# Altium PCB PCB.PcbDoc
Units mil, origin at the board's own origin, x right, y up, seen from the top; angles counter-clockwise.
Board outline 6000 x 4000 mil, 2 copper layers (Top Layer, Bottom Layer); 93 components, 44 nets, 257 pads, 0 vias.
Unrouted connection lines stored in the file: 190.
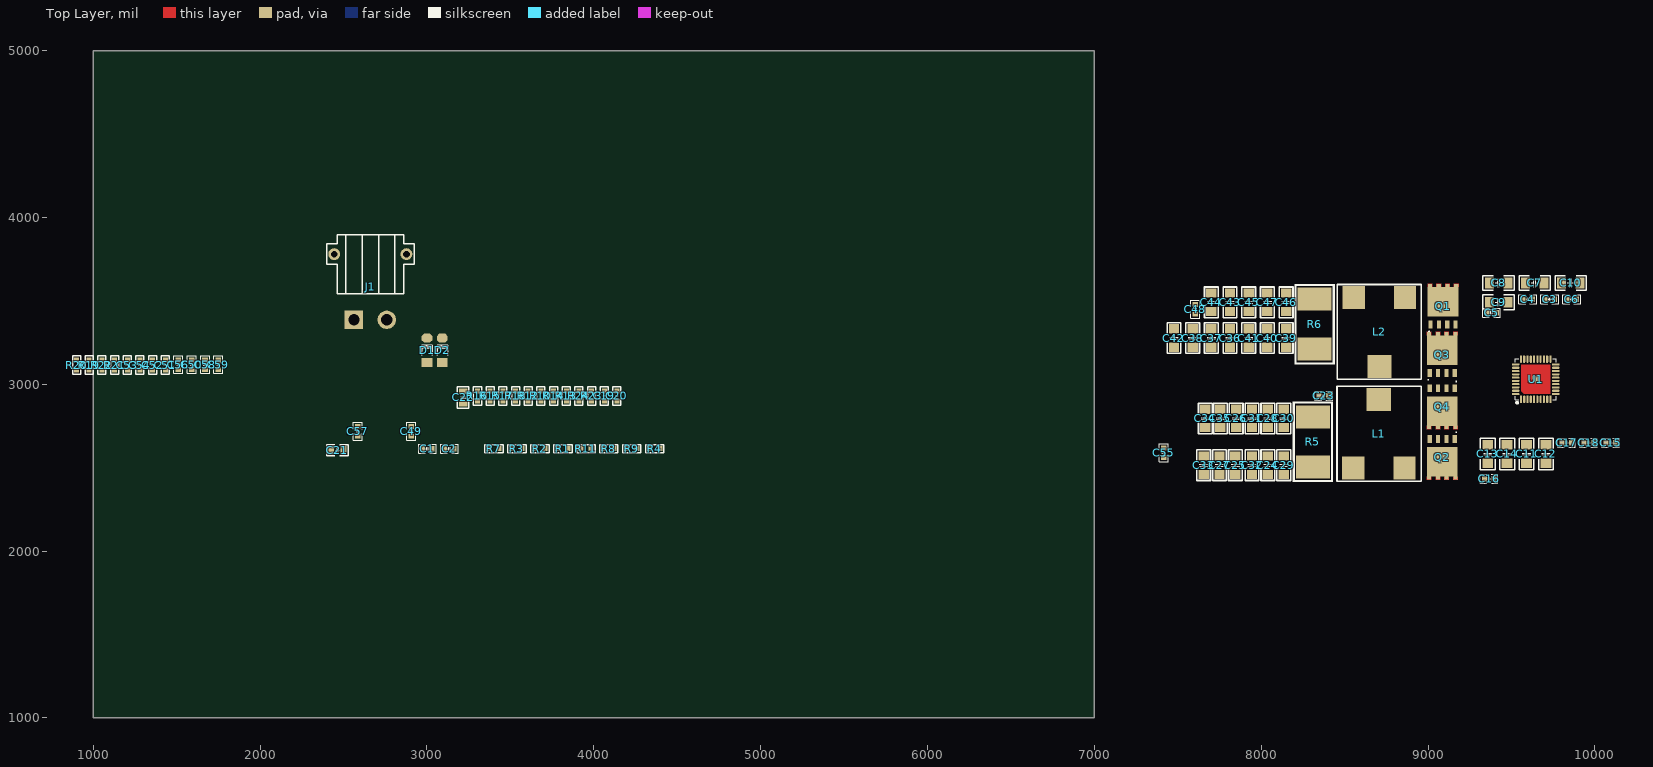
[diagram p0: Top Layer view]
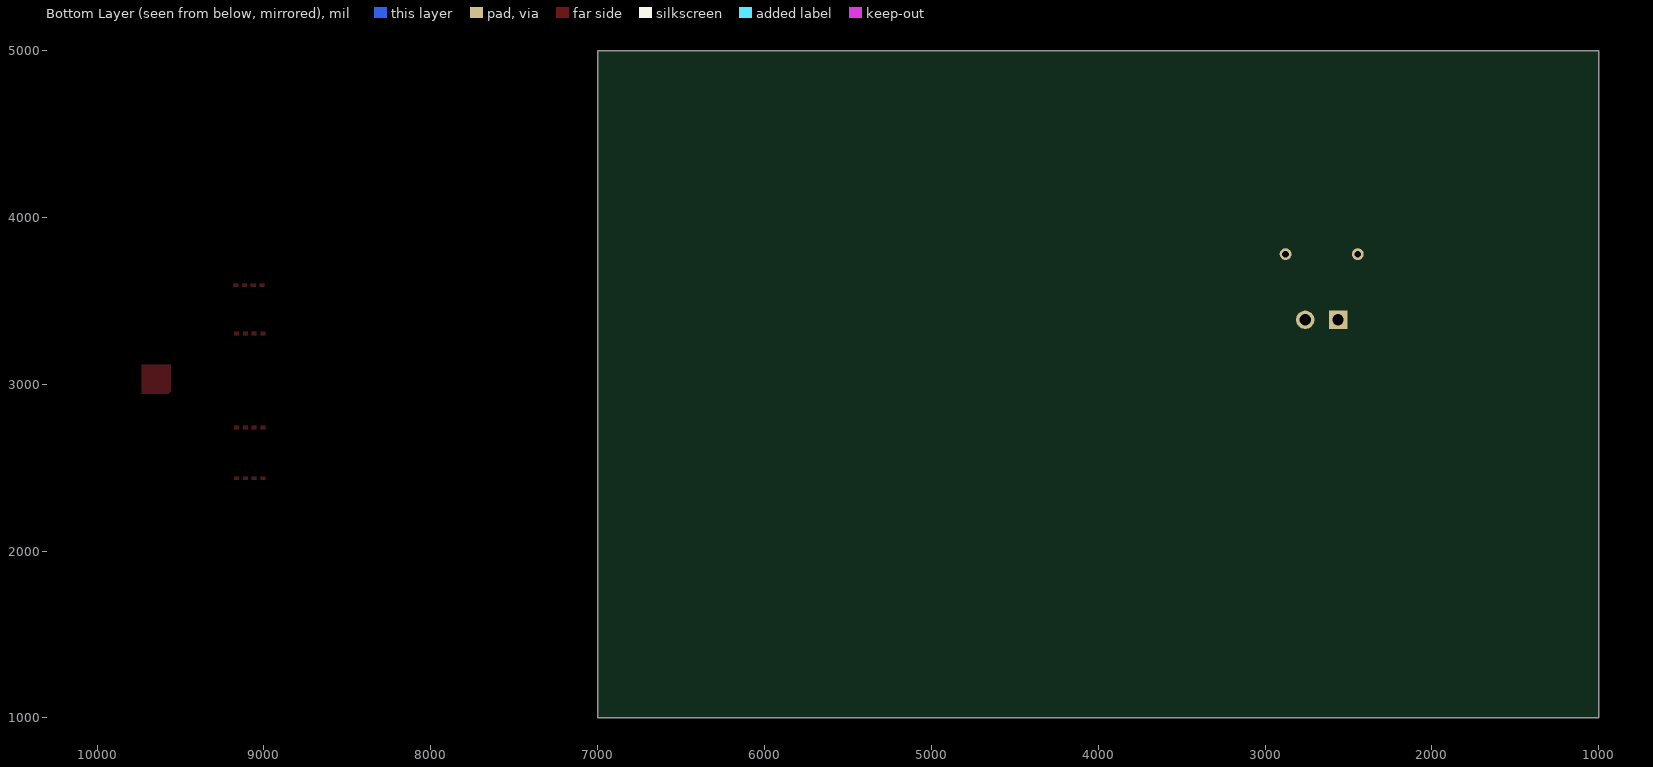
[diagram p1: Bottom Layer view, seen from below]

## Layer stack, top to bottom
Top Solder: solder mask 0.4, Solder Resist, Dk 3.5
Top Layer: signal copper 1.4
Dielectric 1: dielectric 12.6, FR-4, Dk 4.8
Bottom Layer: signal copper 1.4
Bottom Solder: solder mask 0.4, Solder Resist, Dk 3.5

## Board outline
1000,1000 7000,1000 7000,5000 1000,5000

## Design rules (kind name [scope] priority, off if disabled: settings)
Clearance [All] p1: gap=10 ignorepadtopadclearanceinfootprint=FALSE except(0: Arc-Hole Track-Hole SMDPad-Hole THPad-Hole Via-Hole Fill-Hole Poly-Hole Region-Hole Text-Hole)
PolygonConnect [All] p1: connectstyle=Relief reliefconductorwidth=10 reliefentries=4 polygonreliefangle="90 Angle" airgapwidth=10
RoutingVias [All] p1: holewidth=28 width=50 viastyle="Through Hole" minholewidth=28 minwidth=50 maxholewidth=28 maxwidth=50
SolderMaskExpansion [All] p1: expansion=4 istentingtop=FALSE
Width [All] p1: maxlimit=10 minlimit=10 preferedwidth=10
30 further rules are at their usual default settings.

## Components (designator, comment, footprint, x,y, rotation, side; value= is the part's Value field where it differs from the comment)
C1 "100nF 50V" C0603_l 3003,2612.79 r0 top
C2 "100nF 50V" C0603_l 3135,2612.79 r0 top
C3 "100nF 50V" C0603_l 9729,3509 r0 top
C4 "100nF 50V" C0603_l 9597,3509 r0 top
C5 "100nF 50V" C0603_l 9381,3429 r0 top
C6 "100nF 50V" C0603_l 9861,3509 r0 top
C7 "10uF 50V" C1206_l 9639,3607 r0 top
C8 "10uF 50V" C1206_l 9423,3607 r0 top
C9 "10uF 50V" C1206_l 9423,3491 r0 top
C10 "10uF 50V" C1206_l 9855,3607 r0 top
C11 "10uF 50V" C1206_l 9590,2582 r270 top
C12 "10uF 50V" C1206_l 9706,2582 r270 top
C13 "10uF 50V" C1206_l 9358,2582 r270 top
C14 "10uF 50V" C1206_l 9474,2582 r270 top
C15 "100nF 50V" C0603_l 10094,2650 r0 top
C16 "100nF 50V" C0603_l 9366,2434 r0 top
C17 "100nF 50V" C0603_l 9830,2650 r0 top
C18 "100nF 50V" C0603_l 9962,2650 r0 top
C19 "Null" "C 0603_L" 4063,2929.97 r90 top
C20 "Null" "C 0603_L" 4139,2929.97 r90 top
C21 "DNP" "C 0805_L" 2463,2604.79 r0 top
C22 "DNP" "C 0805_L" 3217,2920.79 r90 top
C23 "100nF 50V" C0603_l 8375,2930 r180 top
C24 "22uF 25V" "C 1206_L" 8040,2515 r90 top
C25 "22uF 25V" "C 1206_L" 7845,2514.89 r90 top
C26 "22uF 25V" "C 1206_L" 7850,2795 r270 top
C27 "22uF 25V" "C 1206_L" 7750,2514.89 r90 top
C28 "22uF 25V" "C 1206_L" 8040,2795 r270 top
C29 "22uF 25V" "C 1206_L" 8135,2515 r90 top
C30 "22uF 25V" "C 1206_L" 8135,2795 r270 top
C31 "22uF 25V" "C 1206_L" 7945,2795 r270 top
C32 "22uF 25V" "C 1206_L" 7945,2515 r90 top
C33 "22uF 25V" "C 1206_L" 7655,2514.89 r90 top
C34 "22uF 25V" "C 1206_L" 7665,2795.11 r270 top
C35 "22uF 25V" "C 1206_L" 7755,2795.11 r270 top
C36 "22uF 25V" "C 1206_L" 7813,3277 r270 top
C37 "22uF 25V" "C 1206_L" 7701,3277 r270 top
C38 "22uF 25V" "C 1206_L" 7589,3277 r270 top
C39 "22uF 25V" "C 1206_L" 8149,3277 r270 top
C40 "22uF 25V" "C 1206_L" 8037,3277 r270 top
C41 "22uF 25V" "C 1206_L" 7925,3277 r270 top
C42 "22uF 25V" "C 1206_L" 7477,3277 r270 top
C43 "22uF 25V" "C 1206_L" 7813,3491 r270 top
C44 "22uF 25V" "C 1206_L" 7701,3491 r270 top
C45 "22uF 25V" "C 1206_L" 7925,3491 r270 top
C46 "22uF 25V" "C 1206_L" 8149,3491 r270 top
C47 "22uF 25V" "C 1206_L" 8037,3491 r270 top
C48 "100nF 50V" C0603_l 7605,3450 r270 top
C49 "100nF 50V" C0603_l 2905,2718.79 r90 top
C50 "100nF 50V" C0603_l 1590,3117.79 r90 top
C51 "1nF 50V" "C 0603_L" 1432,3114.97 r90 top
C52 "1nF 50V" "C 0603_L" 1356,3114.97 r90 top
C53 "15pF 50V" "C 0603_L" 1204,3114.97 r90 top
C54 "15pF 50V" "C 0603_L" 1280,3114.97 r90 top
C55 "100nF 50V" C0603_l 7415,2590 r90 top
C56 "100nF 50V" C0603_l 1510,3117.79 r90 top
C57 "100nF 50V" C0603_l 2585,2718.79 r90 top
C58 "100nF 50V" C0603_l 1670,3117.79 r90 top
C59 "100nF 50V" C0603_l 1750,3117.79 r90 top
D1 "1N4148" "MINI_MELF (LL34)" 3000.39,3203.1 r90 top
D2 "1N4148" "MINI_MELF (LL34)" 3092.17,3203.1 r90 top
J1 "XT30" XT30PW-M 2660.75,3583.07 r0 top
L1 "0.68uH" MHW1306SG1R0M 8551.46,2496.61 r0 top
L2 "0.68uH" MHW1306SG1R0M 8862.09,3520 r180 top
Q1 "Nmos_DFN8_5*6" DFN8_5*6 9090,3468.43 r0 top
Q2 "Nmos_DFN8_5*6" DFN8_5*6 9085,2561.57 r180 top
Q3 "Nmos_DFN8_5*6" DFN8_5*6 9085,3178.43 r0 top
Q4 "Nmos_DFN8_5*6" DFN8_5*6 9085,2865 r180 top
R1 "1R 1%" "R 0603_L" 3814.75,2614.79 r0 top
R2 "1R 1%" "R 0603_L" 3677.11,2614.79 r0 top
R3 "1R 1%" "R 0603_L" 3539.47,2614.79 r0 top
R4 "1R 1%" "R 0603_L" 4365.33,2614.79 r0 top
R5 "1mR" R3920 8310,2655 r90 top
R6 "1mR" R3920 8320,3360 r270 top
R7 "DNP" "R 0603_L" 3401.82,2614.79 r0 top
R8 "DNP" "R 0603_L" 4090.04,2614.79 r0 top
R9 "49.9R 1%" "R 0603_L" 4227.69,2614.79 r0 top
R10 "0R 1%" "R 0603_L" 3683,2929.97 r90 top
R11 "0R 1%" "R 0603_L" 3952.4,2614.79 r0 top
R12 "49.9R 1%" "R 0603_L" 3607,2929.97 r90 top
R13 "1R 1%" "R 0603_L" 3835,2929.97 r90 top
R14 "1R 1%" "R 0603_L" 3759,2929.97 r90 top
R15 "1R 1%" "R 0603_L" 3379,2929.97 r90 top
R16 "DNP" "R 0603_L" 3303,2929.97 r90 top
R17 "DNP" "R 0603_L" 3455,2929.97 r90 top
R18 "DNP" "R 0603_L" 3531,2929.97 r90 top
R19 "DNP" "R 0603_L" 976,3114.97 r90 top
R20 "1R 1%" "R 0603_L" 900,3114.97 r90 top
R21 "1R 1%" "R 0603_L" 1128,3114.97 r90 top
R22 "1R 1%" "R 0603_L" 1052,3114.97 r90 top
R23 "20K 1%" "R 0603_L" 3987,2929.97 r90 top
R24 "20K 1%" "R 0603_L" 3911,2929.97 r90 top
U1 "LM5143QRHARQ1" "QFN40 6X6_M" 9645,3030 r0 top

## Footprints (in the part's own frame and the unit in brackets; to place one, negate y for a bottom-side part, rotate by r counter-clockwise, add the part's x,y. Pads: shape width x height; smd on the part's side, far side on the other; paste and mask are expansions set on the pad)
C0603_l [mm] "贴片MLCC电容"
  rect 0.75x0.85 smd: 1(-0.725,0) 2(0.725,0)
  silkscreen extent -1.35,-0.69 1.35,0.69, body extent -0.8,-0.4 0.8,0.4, height 0.8
C1206_l [mm] "贴片MLCC电容"
  rect 1.4x1.65 smd: 1(-1.4,0) 2(1.4,0)
  silkscreen extent -2.39,-1.12 2.39,1.12, body extent -1.6,-0.8 1.6,0.8, height 1.1
"C 0603_L" [mil] "无极性贴片电容"
  rect 30x30 smd: 1(-30.59,0) 2(30.59,0)
  silkscreen extent -55,-24 55,24, body extent -31,-16 31,16, height 32
"C 0805_L" [mil] "无极性贴片电容"
  rect 35x50 smd: 1(-37.4,0) 2(37.4,0)
  silkscreen extent -64,-34 64,34, body extent -39,-24 39,24, height 20
"C 1206_L" [mil] "无极性贴片电容"
  rect 55x62 smd: 1(-55.12,0) 2(55.11,0)
  silkscreen extent -92,-41 92,41, body extent -63,-32 63,32, height 48
DFN8_5*6 [mm] "TDSON, 8-Leads, Body 6.15x5.15mm, Pitch 1.27mm"
  rect 0.65x1.2 smd: 1(-1.905,-2.825) 2(-0.635,-2.825) 3(0.635,-2.825) 4(1.905,-2.825) 5(-2.007,2.794) 5(-0.66,2.794) 5(0.66,2.794) 5(2.007,2.794)
  rect 4.7x4.5 smd: 5(0,0.675)
  Top Layer region: -2.35,2.925 -1.65,2.925 -1.65,3.425 -2.35,3.425
  Top Layer region: 1.65,2.925 2.35,2.925 2.35,3.425 1.65,3.425
  Top Layer region: -1.015,2.925 -0.315,2.925 -0.315,3.425 -1.015,3.425
  Top Layer region: 0.315,2.925 1.015,2.925 1.015,3.425 0.315,3.425
  silkscreen extent -2.23,-3.94 -2.03,-3.74, body extent -2.58,-3.08 2.58,3.08, height 1
MHW1306SG1R0M [mm] "贴片 1R0 1uH 30A大电流一体成型扁平铜线功率电感"
  rect 3.4x3.5 smd: 1(0,0) 2(7.8,0)
  rect 3.7x3.5 smd: EP(3.9,10.5)
  silkscreen extent -2.46,-1.98 10.34,12.47, body extent -2.34,-2.15 10.16,11.04, height 6
"MINI_MELF (LL34)" [mm] "1.5*3.4mm(直径，脚距）"
  rect 1.37x1.62 smd: 1(-1.855,0)
  oct 1.37x1.62 smd: 2(1.855,0)
  silkscreen extent -0.76,-0.8 0.78,0.8, body extent -1.7,-0.75 1.7,0.75, height 1.5
"QFN40 6X6_M" [mm] "40脚，长x宽x高：6x6x1mm，脚距：0.5mm"
  rect 0.325x1.15 smd mask+0.051: 1(-2.25,-3.051)
  oval 0.325x1.15 smd mask+0.051: 2(-1.75,-3.051) 3(-1.25,-3.051) 4(-0.75,-3.051) 5(-0.25,-3.051) 6(0.25,-3.051) 7(0.75,-3.051) 8(1.25,-3.051) 9(1.75,-3.051) 10(2.25,-3.051) 21(2.25,3.076) 22(1.75,3.076) 23(1.25,3.076) 24(0.75,3.076) 25(0.25,3.076) 26(-0.25,3.076) 27(-0.75,3.076) 28(-1.25,3.076) 29(-1.75,3.076) 30(-2.25,3.076)
  oval 1.15x0.325 smd mask+0.051: 11(3.051,-2.25) 12(3.051,-1.75) 13(3.051,-1.25) 14(3.051,-0.75) 15(3.051,-0.25) 16(3.051,0.25) 17(3.051,0.75) 18(3.051,1.25) 19(3.051,1.75) 20(3.051,2.25) 31(-3.051,2.25) 32(-3.051,1.75) 33(-3.051,1.25) 34(-3.051,0.75) 35(-3.051,0.25) 36(-3.051,-0.25) 37(-3.051,-0.75) 38(-3.051,-1.25) 39(-3.051,-1.75) 40(-3.051,-2.25)
  rect 1x1 smd mask+0.051: 41(0,0)
  Top Layer region: -2.2,2.2 2.2,2.2 2.2,-2.2 -1.8,-2.2 -2.2,-1.8
  silkscreen extent -3.1,-3.72 3.1,3.1, body extent -3.01,-3.01 3.01,3.01, height 0.9
R3920 [mm]
  rect 3.5x5.2 smd: 1(-3.81,0) 2(3.81,0)
  silkscreen extent -6.1,-3.05 6.1,3.05, body extent -4.96,-2.55 4.96,2.55, height 1.28
"R 0603_L" [mil] "1/10W贴片电阻"
  rect 30x30 smd: 1(-30.59,0) 2(30.59,0)
  silkscreen extent -55,-24 55,24, body extent -31,-16 32,16, height 16
XT30PW-M [mm] "TH, 4-Leads, Body 13.95x13.3mm"
  rect 2.8x2.8 hole 1.7: 1(-2.5,-5)
  round 2.8 hole 1.7: 2(2.5,-5)
  round 1.8 hole 1: MP1(-5.5,5) MP2(5.5,5)
  silkscreen extent -6.65,-1.05 6.65,7.95, body extent -6.65,-6 6.65,7.95, height 5.05

## Part data
C1 C2 C3 C4 C5 C6 C7 C8 C9 C10 C11 C12 C13 C14 C15 C16 C17 C18 C19 C20 C21 C22 C23 C24 C25 C26 C27 C28 C29 C30 C31 C32 C33 C34 C35 C36 C37 C38 C39 C40 C41 C42 C43 C44 C45 C46 C47 C48 C49 C50 C51 C52 C53 C54 C55 C56 C57 C58 C59: library part C, "无极性贴片电容", BOM名称=无极性贴片电容, 学习资源=www.ooocke.com, 材质=X7R, 版权归属=源创客
D1 D2: "高速开关二极管", BOM名称=高速开关二极管, 学习资源=www.ooocke.com, 版权归属=源创客
L1 L2: library part L, "小功率贴片电感", BOM名称=小功率贴片电感, 学习资源=www.ooocke.com, 版权归属=源创客
R1 R2 R3 R4 R5 R6 R7 R8 R9 R10 R11 R12 R13 R14 R15 R16 R17 R18 R19 R20 R21 R22 R23 R24: library part R, "贴片电阻", BOM名称=贴片电阻, 学习资源=www.ooocke.com, 版权归属=源创客
U1: "DCDC-Buck控制器"
Q1 Q2 Q3 Q4: BOM名称=场效应管, 学习资源=www.ooocke.com, 描述="P沟道 30V/4.2A", 版权归属=源创客

## Nets (pads, with @x,y where several pads share a name; then routed paths per layer and width w, separated by ;. In a path a pad name is that pad's centre, name@x,y a point inside that pad or via, vN(x,y) a via of type N, cw(c..) or ccw(c..) an arc to the next point about the centre after c; other vN are vias at no path point)
AGND: C51.2 C52.2 C54.2 C55.1 C56.1 C57.1 C58.1 C59.1 U1.3 U1.35
FeadBack: U1.28
NetC1_2: C1.2 D1.1 U1.16
NetC2_2: C2.2 D2.1 U1.15
NetC19_1: C19.1 L2.1 Q1.1 Q1.2 Q1.3 Q3.5 R7.1 U1.21
NetC19_2: C19.2 D1.2 U1.20
NetC20_1: C20.1 L1.2 Q2.1 Q2.2 Q2.3 Q4.5 R8.1 U1.10
NetC20_2: C20.2 D2.2 U1.11
NetC21_1: C21.1 R7.2 R19.1
NetC21_2: C21.2 L2.2 R6.1 R12.2 R18.1
NetC22_1: C22.1 R8.2 R16.1
NetC22_2: C22.2 L1.1 R5.1 R9.2 R17.1
NetC49_1: C49.1 R12.1 U1.27
NetC49_2: C49.2 R11.1 R18.2 R19.2 U1.26
NetC50_1: C50.1 R9.1 U1.4
NetC50_2: C50.2 R10.1 R16.2 R17.2 U1.5
NetC51_1: C51.1 R24.1
NetC52_1: C52.1 R23.1
NetC53_1: C53.1 R24.2 U1.29
NetC54_1: C54.1 R23.2 U1.2
NetC55_2: C55.2 U1.30
NetC56_2: C56.2 U1.1
NetC57_2: C57.2 U1.32
NetC58_2: C58.2 U1.36
NetC59_2: C59.2 U1.38
NetQ1_4: Q1.4 R2.1 R4.1
NetQ2_4: Q2.4 R1.1 R3.1
NetQ3_4: Q3.4 R14.1 R20.1
NetQ4_4: Q4.4 R13.1 R15.1
NetR1_2: R1.2 U1.9
NetR2_2: R2.2 U1.22
NetR3_2: R3.2 U1.8
NetR4_2: R4.2 U1.23
NetR13_2: R13.2 U1.13
NetR14_2: R14.2 U1.18
NetR15_2: R15.2 U1.12
NetR20_2: R20.2 U1.19
NetR21_2: R21.2 U1.39
NetR22_2: R22.2 U1.37
PGND: C1.1 C2.1 C3.1 C4.1 C5.1 C6.1 C7.1 C8.1 C9.1 C10.1 C11.1 C12.1 C13.1 C14.1 C15.1 C16.1 C17.1 C18.1 C23.1 C24.1 C25.1 C26.1 C27.1 C28.1 C29.1 C30.1 C31.1 C32.1 C33.1 C34.1 C35.1 C36.1 C37.1 C38.1 C39.1 C40.1 C41.1 C42.1 C43.1 C44.1 C45.1 C46.1 C47.1 C48.1 J1.2 Q3.1 Q3.2 Q3.3 Q4.1 Q4.2 Q4.3 R21.1 R22.1 U1.14 U1.17 U1.41
PWR_GOOD1: U1.24
PWR_GOOD2: U1.7
VBUS: C3.2 C4.2 C5.2 C6.2 C7.2 C8.2 C9.2 C10.2 C11.2 C12.2 C13.2 C14.2 C15.2 C16.2 C17.2 C18.2 J1.1 Q1.5 Q2.5 U1.25 U1.31 U1.34 U1.40
VOUT12V: C23.2 C24.2 C25.2 C26.2 C27.2 C28.2 C29.2 C30.2 C31.2 C32.2 C33.2 C34.2 C35.2 C36.2 C37.2 C38.2 C39.2 C40.2 C41.2 C42.2 C43.2 C44.2 C45.2 C46.2 C47.2 C48.2 R5.2 R6.2 R10.2 R11.2
pads on no net: C53.2 J1.MP1 J1.MP2 L1.EP L2.EP U1.6 U1.33